# EAGLE board sistem minimum (EAGLE 4.11)
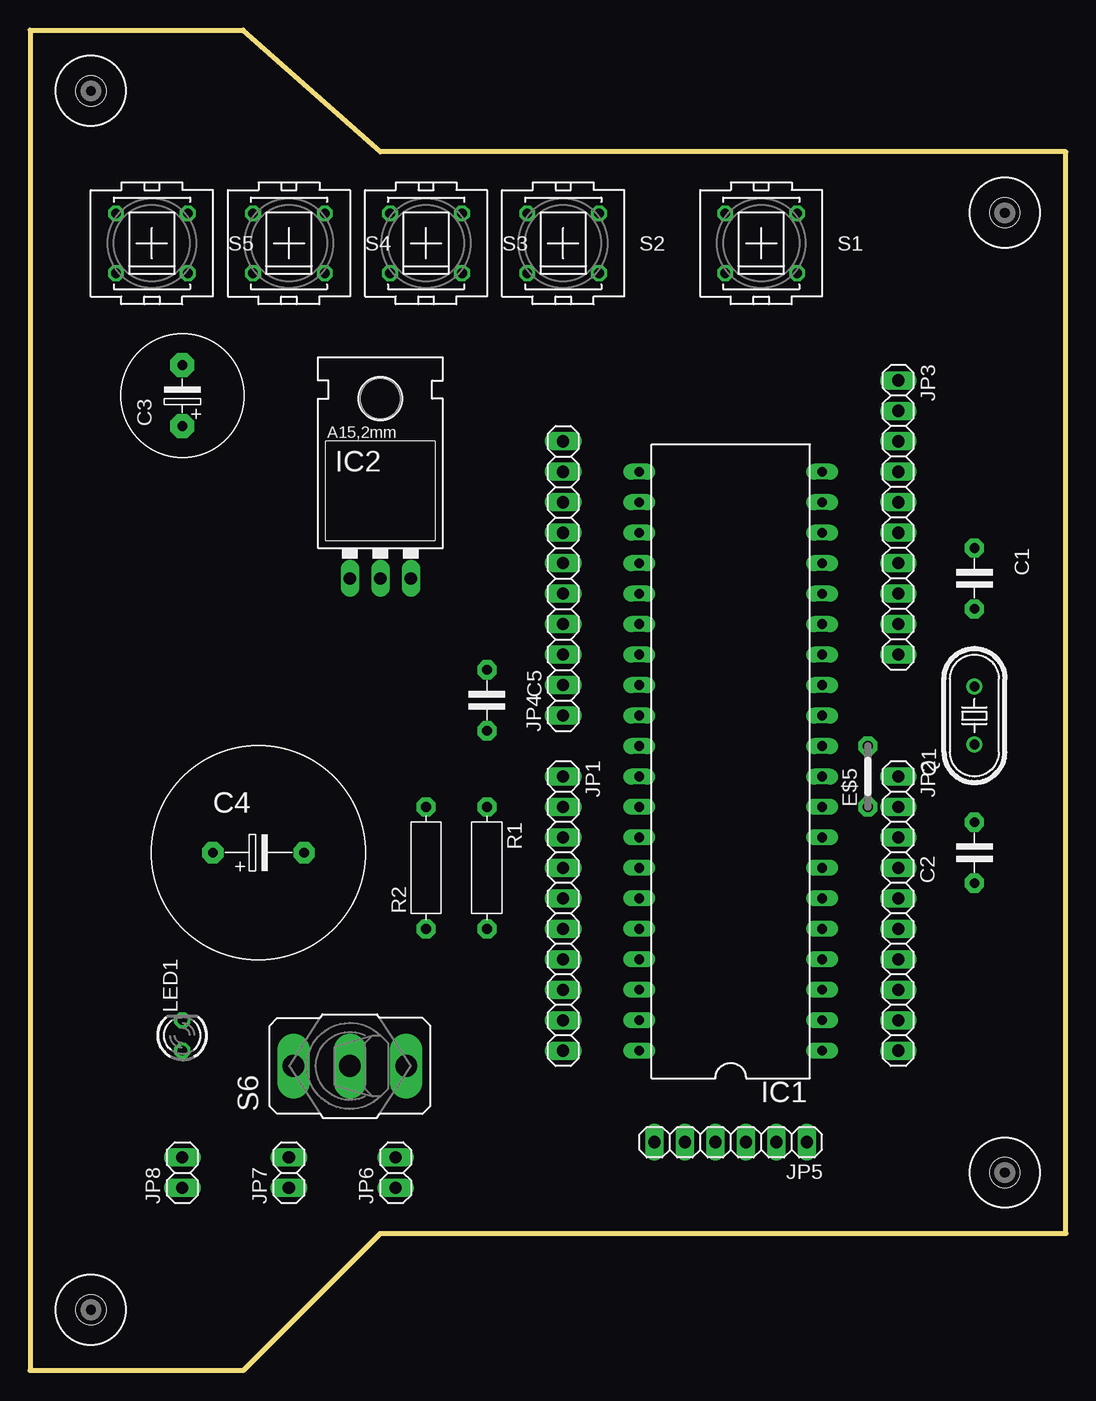
[diagram p0: board, top side]
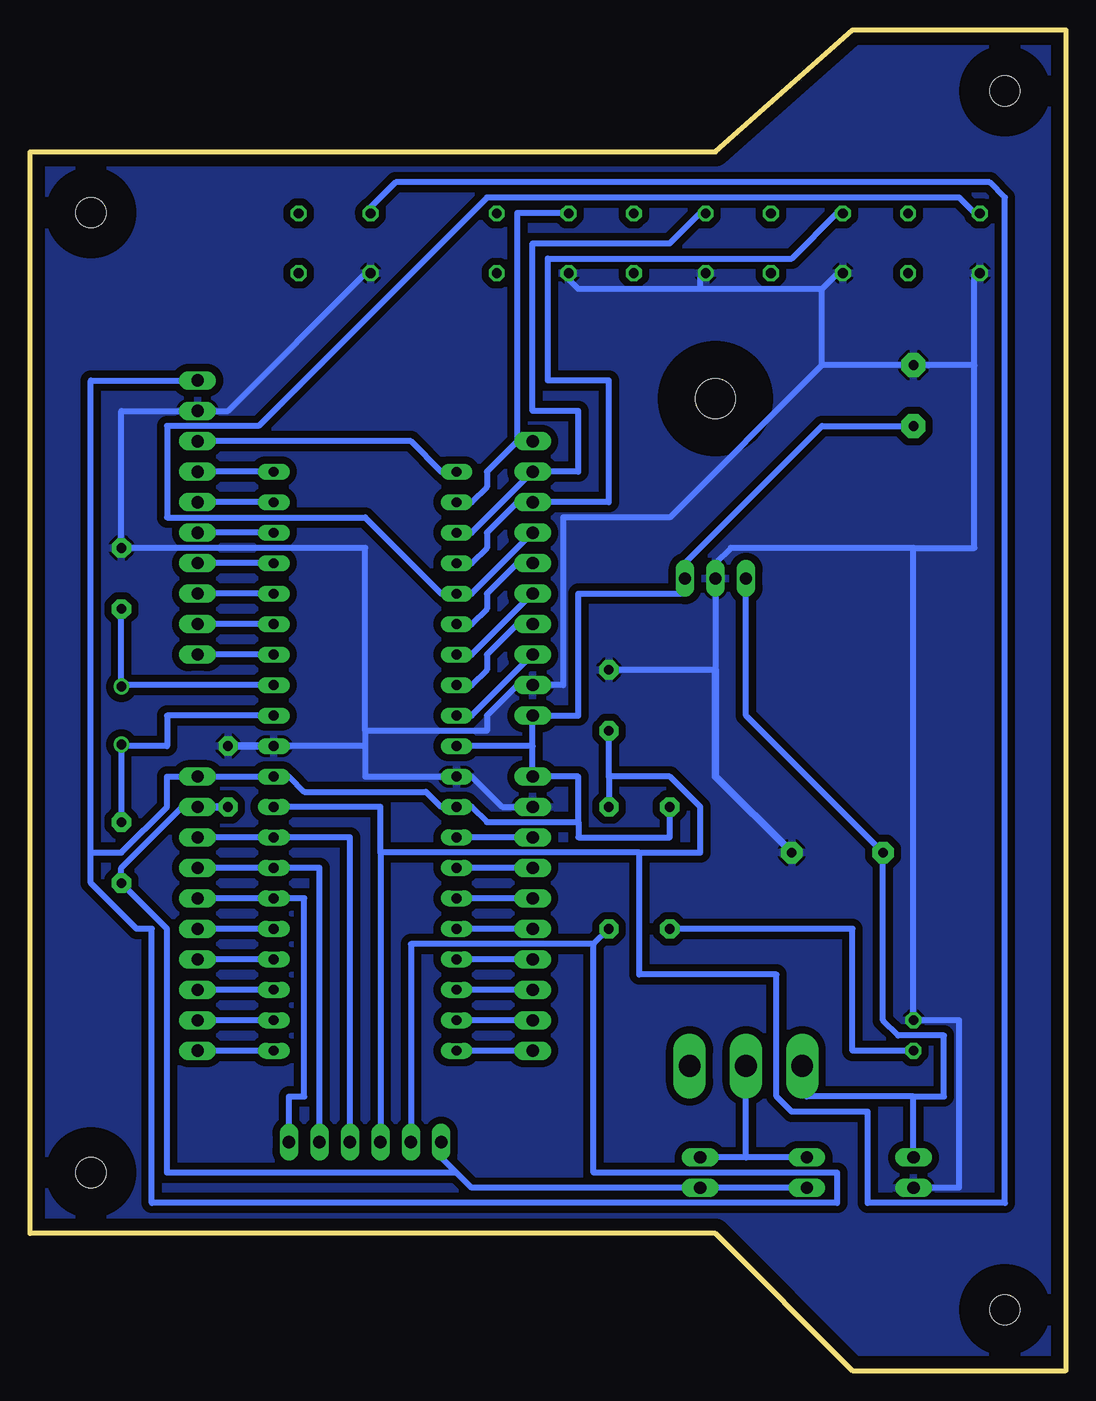
[diagram p1: board, bottom side, seen from below]

Size 86.36 x 111.76 mm. Coordinates in mm from the lower left corner, seen from the top.
Outline: 29.21,11.43 86.36,11.43 86.36,101.6 29.21,101.6 17.78,111.76 0,111.76 0,0 17.78,0 29.21,11.43
Copper layers (1*16): Top 0.035mm / dielectric 1.5mm / Bottom 0.035mm
Design rules "default": minimum track width 20mil, minimum drill 24mil, track to track 10mil, track to pad 10mil, pad to pad 10mil, via to via 10mil, smd to smd 8mil, copper to edge 40mil, drill to drill 8mil, minimum pad ring 10mil, minimum via ring 8mil, stop-mask expansion 4mil, vias tented up to drill 0mil, thermal gap 10mil

## Footprints (pad centres in the part's own frame; a part is rotated, then mirrored left to right if it is on the bottom)
C-5 = drill 0.813 pad 1.6 octagon: 1 -2.54,0; 2 2.54,0
ES-5 = drill 0.813 pad 2.007 octagon: 1 -2.54,0; 2 2.54,0
ES-7,5 = drill 0.813 pad 1.778 octagon: 1 -3.81,0; 2 3.81,0
DRIL-2,5 = hole 2.5: 0,0
05 = drill 0.813 pad 1.6 octagon: 1 -2.54,0; 2 2.54,0
DIL40 = drill 0.813 long: 1 -24.13,-7.62; 2 -21.59,-7.62; 3 -19.05,-7.62; 4 -16.51,-7.62; 5 -13.97,-7.62; 6 -11.43,-7.62; 7 -8.89,-7.62; 8 -6.35,-7.62; 9 -3.81,-7.62; 10 -1.27,-7.62; 11 1.27,-7.62; 12 3.81,-7.62; 13 6.35,-7.62; 14 8.89,-7.62; 15 11.43,-7.62; 16 13.97,-7.62; 17 16.51,-7.62; 18 19.05,-7.62; 19 21.59,-7.62; 20 24.13,-7.62; 21 24.13,7.62; 22 21.59,7.62; 23 19.05,7.62; 24 16.51,7.62; 25 13.97,7.62; 26 11.43,7.62; 27 8.89,7.62; 28 6.35,7.62; 29 3.81,7.62; 30 1.27,7.62; 31 -1.27,7.62; 32 -3.81,7.62; 33 -6.35,7.62; 34 -8.89,7.62; 35 -11.43,7.62; 36 -13.97,7.62; 37 -16.51,7.62; 38 -19.05,7.62; 39 -21.59,7.62; 40 -24.13,7.62
78XXL = drill 1.016 long: GND 0,-3.81; IN -2.54,-3.81; OUT 2.54,-3.81 | hole 3.302: 0,11.176
1X10 = drill 1.016 long: 1 -11.43,0; 2 -8.89,0; 3 -6.35,0; 4 -3.81,0; 5 -1.27,0; 6 1.27,0; 7 3.81,0; 8 6.35,0; 9 8.89,0; 10 11.43,0
1X06 = drill 1.016 long: 1 -6.35,0; 2 -3.81,0; 3 -1.27,0; 4 1.27,0; 5 3.81,0; 6 6.35,0
1X02 = drill 1.016 long: 1 -1.27,0; 2 1.27,0
LED3MM = drill 0.813 octagon: A -1.27,0; K 1.27,0
HC49U70 = drill 0.813 round: 1 -2.413,0; 2 2.413,0
R-10 = drill 0.813 pad 1.6 octagon: 1 -5.08,0; 2 5.08,0
PVA1R = drill 0.813 octagon: 1 -2.997,2.489; 2 -2.997,-2.489; 3 2.997,2.489; 4 2.997,-2.489
M9040P = drill 1.803 long: 1 0,4.699; 2 0,0; 3 0,-4.699

## Placement (x,y rotation side)
C1  [C-5]  78.74,66.04 270 top
C2  [C-5]  78.74,43.18 90 top
C3  [ES-5]  12.7,81.28 90 top
C4  [ES-7,5]  19.05,43.18 0 top
C5  [C-5]  38.1,55.88 270 top
E$1  [DRIL-2,5]  5.08,106.68 0 top
E$2  [DRIL-2,5]  5.08,5.08 0 top
E$3  [DRIL-2,5]  81.28,16.51 0 top
E$4  [DRIL-2,5]  81.28,96.52 0 top
E$5  [05]  69.85,49.53 90 top
IC1  MEGA163LP  [DIL40]  58.42,50.8 90 top
IC2  [78XXL]  29.21,69.85 0 top
JP1  [1X10]  44.45,38.1 270 top
JP2  [1X10]  72.39,38.1 270 top
JP3  [1X10]  72.39,71.12 270 top
JP4  [1X10]  44.45,66.04 90 top
JP5  [1X06]  58.42,19.05 180 top
JP6  [1X02]  30.48,16.51 90 top
JP7  [1X02]  21.59,16.51 90 top
JP8  [1X02]  12.7,16.51 90 top
LED1  [LED3MM]  12.7,27.94 90 top
Q1  [HC49U70]  78.74,54.61 90 top
R1  [R-10]  38.1,41.91 270 top
R2  [R-10]  33.02,41.91 90 top
S1  PVA1R  [PVA1R]  60.96,93.98 0 top
S2  PVA1R  [PVA1R]  44.45,93.98 0 top
S3  PVA1R  [PVA1R]  33.02,93.98 0 top
S4  PVA1R  [PVA1R]  21.59,93.98 0 top
S5  PVA1R  [PVA1R]  10.16,93.98 0 top
S6  [M9040P]  26.67,25.4 90 top

## Library data of the parts
C1-C5 R1 R2 = discrete
E$1-E$4 = special
E$5 = jumper
IC1 = atmel
IC2 = v-reg
JP1-JP8 = pinhead
LED1 = led
Q1 = crystal
S1-S5 = switch-misc
S6 = switch

## Nets
GND: C1.1 C3.2 C4.2 C5.1 E$5.2 IC1.11 IC1.31 IC2.GND JP1.2 JP3.2 JP4.2 JP8.1 LED1.K S1.2 S2.2 S3.2 S4.2 S5.2
N$1: IC1.40 JP1.10
N$2: IC1.39 JP1.9
N$3: IC1.38 JP1.8
N$4: IC1.37 JP1.7
N$5: IC1.36 JP1.6
N$6: IC1.35 JP1.5
N$7: IC1.34 JP1.4
N$8: IC1.33 JP1.3
N$9: IC1.8 JP2.3 JP5.3
N$10: IC1.7 JP2.4 JP5.2
N$11: IC1.6 JP2.5 JP5.1
N$12: IC1.5 JP2.6
N$13: IC1.4 JP2.7
N$14: IC1.3 JP2.8
N$15: IC1.2 JP2.9
N$16: IC1.1 JP2.10
N$17: IC1.14 JP3.10
N$18: IC1.22 JP4.10 S2.1
N$19: IC1.15 JP3.9
N$20: IC1.16 JP3.8
N$21: IC1.17 JP3.7
N$22: IC1.18 JP3.6
N$23: IC1.19 JP3.5
N$24: IC1.20 JP3.4
N$25: IC1.21 JP3.3
N$26: IC1.23 JP4.9 S3.1
N$27: IC1.24 JP4.8 S4.1
N$28: IC1.25 JP4.7 S5.1
N$29: IC1.26 JP4.6
N$30: IC1.27 JP4.5
N$31: IC1.28 JP4.4
N$32: IC1.29 JP4.3
N$33: JP6.2 JP7.2 S6.2
N$34: C5.2 IC1.9 JP5.4 R1.1 S1.1
N$35: C3.1 IC1.10 IC1.30 IC1.32 IC2.OUT JP1.1 JP2.1 JP3.1 JP4.1 JP5.5 R1.2 R2.2
N$36: LED1.A R2.1
N$37: C1.2 IC1.13 Q1.2
N$38: C2.2 IC1.12 Q1.1
N$39: C4.1 IC2.IN JP8.2 S6.1
S$2: C2.1 E$5.1 JP2.2 JP5.6 JP6.1 JP7.1

## Tracks (layer width: path | path; a pad name or v marks a point on that pad's centre or on a via)
GND
  Bottom 0.508: S1.2 58.42,91.44 69.85,80.01 JP3.2 78.74,80.01 C1.1 58.42,68.58 58.42,53.34 | JP1.2 46.99,46.99 49.53,49.53 IC1.31 58.42,49.53 58.42,52.07 | 58.42,52.07 IC1.11 | 58.42,53.34 58.42,52.07 | 58.42,53.34 48.26,53.34 48.26,54.61 45.72,57.15 JP4.2 41.91,57.15 41.91,71.12 33.02,71.12 20.32,83.82 | S2.2 41.91,91.44 40.64,90.17 30.48,90.17 | S3.2 30.48,91.44 30.48,90.17 | S4.2 19.05,91.44 20.32,90.17 | 20.32,90.17 30.48,90.17 | C5.1 29.21,58.42 IC2.GND 29.21,67.31 27.94,68.58 12.7,68.58 | 20.32,83.82 20.32,90.17 | 11.43,83.82 C3.2 | 11.43,83.82 20.32,83.82 | S5.2 7.62,91.44 7.62,83.82 | 7.62,83.82 11.43,83.82 | 7.62,83.82 7.62,68.58 12.7,68.58 | 12.7,68.58 LED1.K 8.89,29.21 8.89,15.24 JP8.1
  Bottom 0.61: IC1.11 E$5.2 | C4.2 29.21,49.53 29.21,58.42
  pour Bottom (isolate 0.61): 0,111.76 17.78,111.76 29.21,101.6 86.36,101.6 86.36,11.43 29.21,11.43 17.78,0 0,0
  pour Bottom (isolate 0.61): 0,111.76 17.78,111.76 29.21,101.6 86.36,101.6 86.36,11.43 29.21,11.43 17.78,0 0,0
N$1
  Bottom 0.508: JP1.10 IC1.40
N$2
  Bottom 0.508: JP1.9 IC1.39
N$3
  Bottom 0.508: JP1.8 IC1.38
N$4
  Bottom 0.508: JP1.7 IC1.37
N$5
  Bottom 0.508: JP1.6 IC1.36
N$6
  Bottom 0.508: JP1.5 IC1.35
N$7
  Bottom 0.508: JP1.4 IC1.34
N$8
  Bottom 0.508: JP1.3 IC1.33
N$9
  Bottom 0.508: JP2.3 IC1.8 59.69,44.45 JP5.3
N$10
  Bottom 0.508: JP2.4 IC1.7 62.23,41.91 JP5.2
N$11
  Bottom 0.508: JP2.5 IC1.6 63.5,39.37 63.5,22.86 64.77,22.86 JP5.1
N$12
  Bottom 0.508: IC1.5 JP2.6
N$13
  Bottom 0.508: IC1.4 JP2.7
N$14
  Bottom 0.508: IC1.3 JP2.8
N$15
  Bottom 0.508: IC1.2 JP2.9
N$16
  Bottom 0.508: IC1.1 JP2.10
N$17
  Bottom 0.508: IC1.14 JP3.10
N$18
  Bottom 0.508: 45.72,77.47 45.72,96.52 41.91,96.52 S2.1 | 45.72,77.47 48.26,74.93 48.26,73.66 49.53,72.39 IC1.22 | JP4.10 45.72,77.47
N$19
  Bottom 0.508: IC1.15 JP3.9
N$20
  Bottom 0.508: IC1.16 JP3.8
N$21
  Bottom 0.508: IC1.17 JP3.7
N$22
  Bottom 0.508: IC1.18 JP3.6
N$23
  Bottom 0.508: IC1.19 JP3.5
N$24
  Bottom 0.508: IC1.20 JP3.4
N$25
  Bottom 0.508: IC1.21 52.07,74.93 54.61,77.47 JP3.3
N$26
  Bottom 0.508: S3.1 30.48,96.52 33.02,93.98 44.45,93.98 44.45,80.01 40.64,80.01 40.64,74.93 JP4.9 49.53,69.85 IC1.23
N$27
  Bottom 0.508: S4.1 19.05,96.52 22.86,92.71 43.18,92.71 43.18,82.55 38.1,82.55 38.1,72.39 JP4.8 45.72,72.39 48.26,69.85 48.26,68.58 49.53,67.31 IC1.24
N$28
  Bottom 0.508: JP4.7 49.53,64.77 IC1.25 52.07,64.77 58.42,71.12 74.93,71.12 74.93,78.74 67.31,78.74 48.26,97.79 8.89,97.79 7.62,96.52 S5.1
N$29
  Bottom 0.508: IC1.26 49.53,62.23 48.26,63.5 48.26,64.77 45.72,67.31 JP4.6
N$30
  Bottom 0.508: JP4.5 49.53,59.69 IC1.27
N$31
  Bottom 0.508: IC1.28 49.53,57.15 48.26,58.42 48.26,59.69 45.72,62.23 JP4.4
N$32
  Bottom 0.508: JP4.3 49.53,54.61 IC1.29
N$33
  Bottom 0.508: JP7.2 26.67,17.78 | 26.67,17.78 JP6.2 | 26.67,17.78 S6.2
N$34
  Bottom 0.508: 38.1,49.53 C5.2 | 38.1,49.53 R1.1 | 35.56,43.18 35.56,33.02 24.13,33.02 24.13,22.86 22.86,21.59 16.51,21.59 16.51,13.97 5.08,13.97 5.08,97.79 6.35,99.06 55.88,99.06 58.42,96.52 S1.1 | 35.56,43.18 57.15,43.18 | 57.15,43.18 57.15,46.99 IC1.9 | 57.15,43.18 JP5.4 | 38.1,49.53 33.02,49.53 30.48,46.99 30.48,43.18 35.56,43.18
N$35
  Bottom 0.508: 44.45,52.07 JP1.1 40.64,49.53 40.64,45.72 | 44.45,52.07 JP4.1 40.64,54.61 40.64,64.77 31.75,64.77 IC2.OUT 31.75,67.31 20.32,78.74 C3.1 | 44.45,52.07 IC1.30 | R2.2 33.02,44.45 40.64,44.45 40.64,45.72 | 39.37,35.56 54.61,35.56 JP5.5 | 39.37,35.56 R1.2 | 81.28,43.18 81.28,82.55 JP3.1 | 81.28,43.18 78.74,43.18 74.93,46.99 74.93,49.53 JP2.1 IC1.10 64.77,49.53 63.5,48.26 53.34,48.26 52.07,46.99 IC1.32 49.53,46.99 48.26,45.72 40.64,45.72 | 39.37,35.56 39.37,16.51 19.05,16.51 19.05,13.97 76.2,13.97 76.2,36.83 77.47,36.83 81.28,40.64 81.28,43.18
N$36
  Bottom 0.508: LED1.A 17.78,26.67 17.78,36.83 R2.1
N$37
  Bottom 0.508: 78.74,57.15 C1.2 | IC1.13 78.74,57.15 | 78.74,57.15 Q1.2
N$38
  Bottom 0.508: 78.74,52.07 74.93,52.07 74.93,54.61 IC1.12 | 78.74,52.07 C2.2 | 78.74,52.07 Q1.1
N$39
  Bottom 0.508: JP8.2 12.7,22.86 | 12.7,22.86 21.59,22.86 S6.1 | IC2.IN 26.67,54.61 C4.1 15.24,29.21 13.97,27.94 10.16,27.94 10.16,22.86 12.7,22.86
S$2
  Bottom 0.508: JP2.2 73.66,46.99 78.74,41.91 C2.1 74.93,36.83 74.93,16.51 50.8,16.51 | JP5.6 52.07,17.78 50.8,16.51 | 50.8,16.51 49.53,15.24 JP6.1 JP7.1
  Bottom 0.61: JP2.2 E$5.1